# EAGLE board Regulated Linear Power Supply (EAGLE 9.6.2)
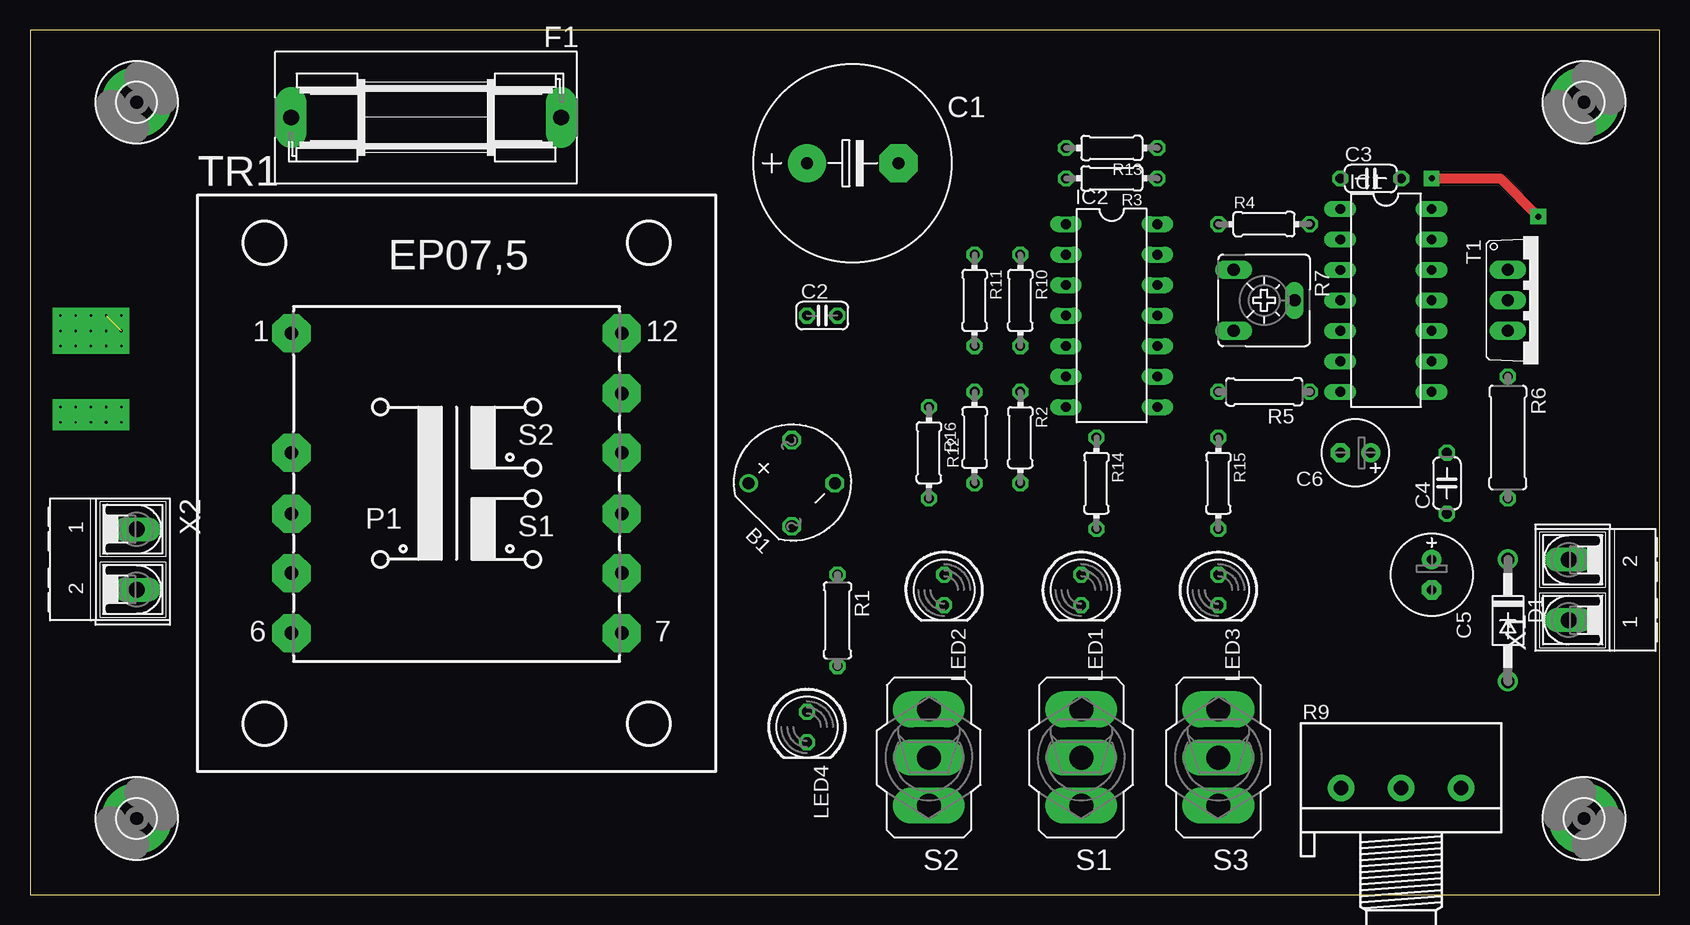
[diagram p0: board, top side]
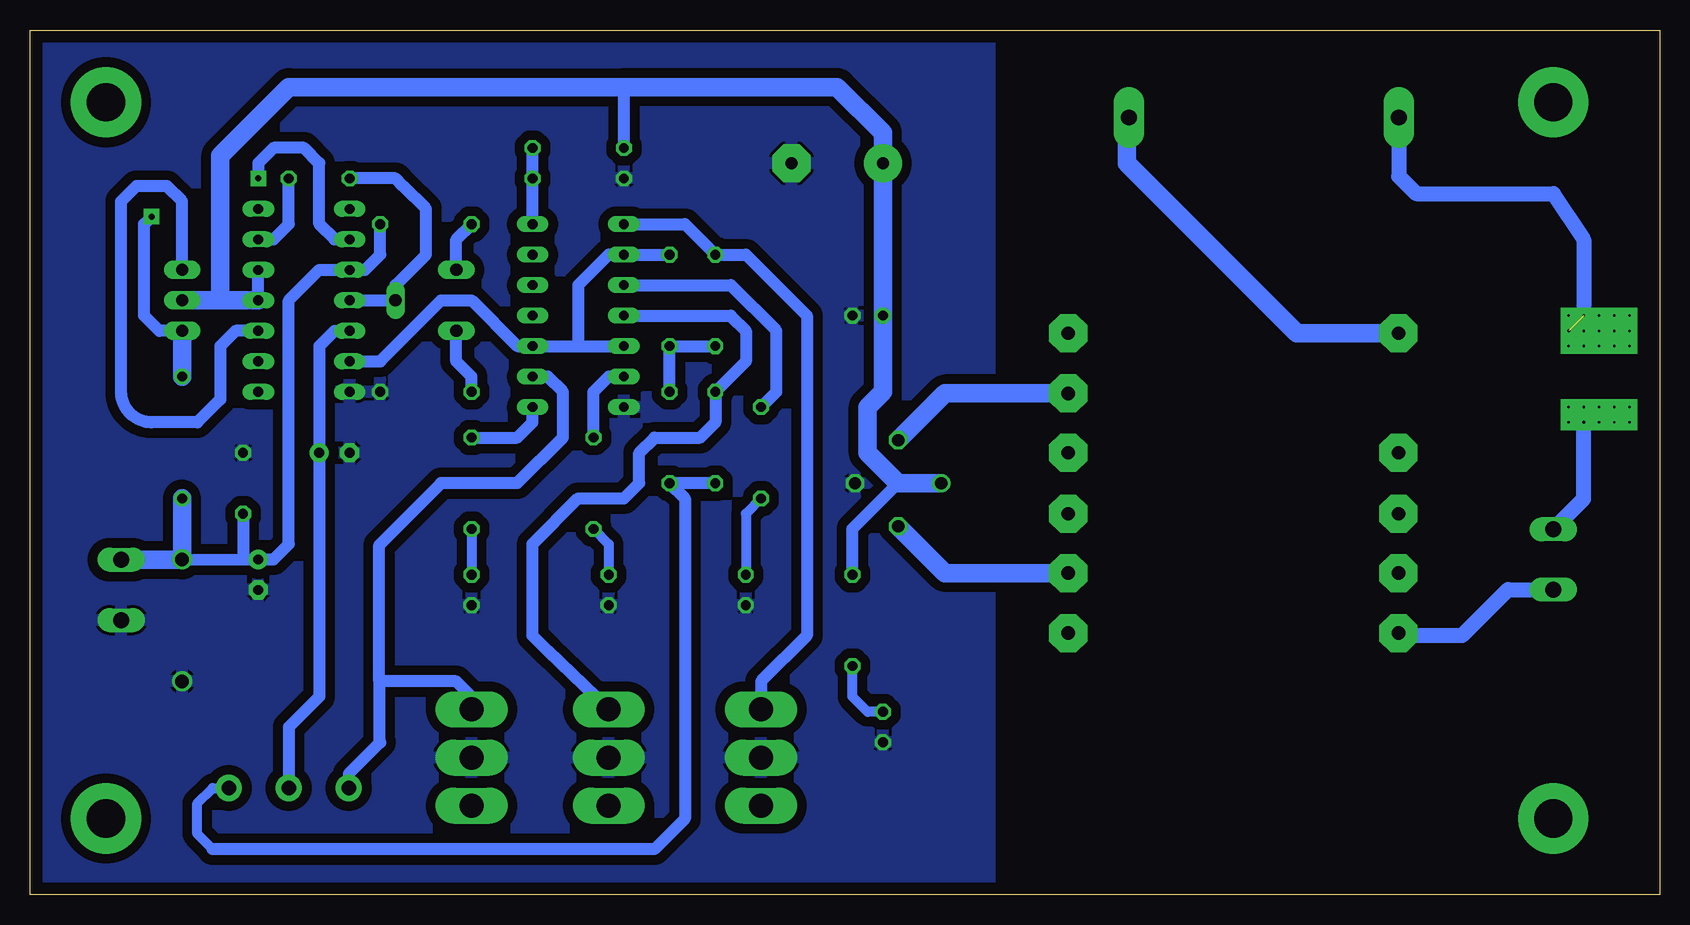
[diagram p1: board, bottom side, seen from below]

Size 135.87 x 72.06 mm. Coordinates in mm from the lower left corner, seen from the top.
Outline: 0,0 135.87,0 135.87,72.06 0,72.06 0,0
Copper layers (1*16): Top 0.035mm / dielectric 1.5mm / Bottom 0.035mm
Design rules "default": minimum track width 6mil, minimum drill 0.35mm, track to track 6mil, track to pad 6mil, pad to pad 6mil, via to via 6mil, smd to smd 6mil, copper to edge 40mil, drill to drill 6mil, minimum pad ring 10mil, minimum via ring 8mil, stop-mask expansion 4mil, vias tented up to drill 0mil, thermal gap 10mil

## Footprints (pad centres in the part's own frame; a part is rotated, then mirrored left to right if it is on the bottom)
RB1A = drill 1.016: + -2.54,2.54 | drill 1.016 octagon: - 2.54,-2.54; AC1 2.54,2.54; AC2 -2.54,-2.54
E7,5-16 = drill 1.016 pad 3.15: + -3.81,0 | drill 1.016 pad 3.15 octagon: - 3.81,0
C025-024X044 = drill 0.813 octagon: 1 -1.27,0; 2 1.27,0
C050-024X044 = drill 0.813 octagon: 1 -2.54,0; 2 2.54,0
E2,5-7 = drill 0.813 pad 1.6: + -1.27,0 | drill 0.813 pad 1.6 octagon: - 1.27,0
E2,5-6 = drill 0.813 pad 1.6: + -1.27,0 | drill 0.813 pad 1.6 octagon: - 1.27,0
DO41-10 = drill 1.118: A 5.08,0; C -5.08,0
SH22,5A = drill 1.321 pad 2.54 long: 1 -11.252,0; 2 11.252,0
3,2-PAD = drill 3.2 pad 5.842: B3,2 0,0
DIL14 = drill 0.813 long: 1 -7.62,-3.81; 2 -5.08,-3.81; 3 -2.54,-3.81; 4 0,-3.81; 5 2.54,-3.81; 6 5.08,-3.81; 7 7.62,-3.81; 8 7.62,3.81; 9 5.08,3.81; 10 2.54,3.81; 11 0,3.81; 12 -2.54,3.81; 13 -5.08,3.81; 14 -7.62,3.81
LED5MM = drill 0.813 octagon: A -1.27,0; K 1.27,0
0207/7 = drill 0.813 octagon: 1 -3.81,0; 2 3.81,0
0204/7 = drill 0.813 octagon: 1 -3.81,0; 2 3.81,0
0309/10 = drill 0.813 octagon: 1 -5.08,0; 2 5.08,0
CA6V = drill 1.016 long: A -2.54,-2.54; E 2.54,-2.54; S 0,2.54
3RP/1610N = drill 1.2 pad 2.184: 1 -5,0; 2 0,0; 3 5,0
320-916 = drill 2.007 long: 1 0,4.013; 2 0,0; 3 0,-4.013
TO220V = drill 1.016 long: 1 -2.54,-2.54; 2 0,-2.54; 3 2.54,-2.54
EP07,5 = drill 1.118 pad 3.175 octagon: 1 -13.767,12.497; 3 -13.767,2.54; 4 -13.767,-2.54; 5 -13.767,-7.493; 6 -13.767,-12.497; 7 13.767,-12.497; 8 13.767,-7.493; 9 13.767,-2.54; 10 13.767,2.54; 11 13.767,7.493; 12 13.767,12.497
AK500/2-H = drill 1.321 long: 1 -2.515,0; 2 2.515,0

## Placement (x,y rotation side)
B1  [RB1A]  63.5,34.29 45 top
C1  4700uF  [E7,5-16]  68.58,60.96 0 top
C2  100nF  [C025-024X044]  66.04,48.26 0 top
C3  120pF  [C050-024X044]  111.76,59.69 0 top
C4  330nF  [C050-024X044]  118.11,34.29 90 top
C5  100uF  [E2,5-7]  116.84,26.67 270 top
C6  4.6uF  [E2,5-6]  110.49,36.83 180 top
D1  1N4004  [DO41-10]  123.19,22.86 270 top
F1  [SH22,5A]  33.02,64.77 180 top
H1  MOUNT-PAD-ROUND3.2  [3,2-PAD]  8.89,6.35 0 top
H2  MOUNT-PAD-ROUND3.2  [3,2-PAD]  8.89,66.04 0 top
H3  MOUNT-PAD-ROUND3.2  [3,2-PAD]  129.54,6.35 90 top
H4  MOUNT-PAD-ROUND3.2  [3,2-PAD]  129.54,66.04 0 top
IC1  LM723N  [DIL14]  113.03,49.53 270 top
IC2  74HC86N  [DIL14]  90.17,48.26 270 top
LED1  [LED5MM]  87.63,25.4 270 top
LED2  [LED5MM]  76.2,25.4 270 top
LED3  [LED5MM]  99.06,25.4 270 top
LED4  [LED5MM]  64.77,13.97 270 top
R1  1k  [0207/7]  67.31,22.86 270 top
R2  1k  [0204/7]  82.55,38.1 270 top
R3  2,2k  [0204/7]  90.17,59.69 180 top
R4  5,1k  [0204/7]  102.87,55.88 0 top
R5  6,8k  [0207/7]  102.87,41.91 180 top
R6  1  [0309/10]  123.19,38.1 270 top
R7  200  [CA6V]  102.87,49.53 270 top
R9  100k  [3RP/1610N]  114.3,8.89 0 top
R10  1,2k  [0204/7]  82.55,49.53 270 top
R11  3,6k  [0204/7]  78.74,49.53 270 top
R12  1,5k  [0204/7]  78.74,38.1 90 top
R13  6,2k  [0204/7]  90.17,62.23 180 top
R14  270  [0204/7]  88.9,34.29 270 top
R15  270  [0204/7]  99.06,34.29 270 top
R16  270  [0204/7]  74.93,36.83 270 top
S1  [320-916]  87.63,11.43 180 top
S2  [320-916]  74.93,11.43 180 top
S3  [320-916]  99.06,11.43 180 top
T1  [TO220V]  125.73,49.53 270 top
TR1  EP07,5  [EP07,5]  35.56,34.29 0 top
X1  [AK500/2-H]  128.27,25.4 90 top
X2  [AK500/2-H]  8.89,27.94 270 top

## Library data of the parts
B1 = rectifier
C1-C6 R1-R6 R10-R16 = rcl
D1 = diode
F1 = fuse; MPN: 0031.7701.11; OC_FARNELL: unknown; OC_NEWARK: 04F1224
H1-H4 = holes
IC1 = linear
IC2 = 74xx-eu
LED1-LED4 = led
R7 R9 = pot
S1-S3 = switch
T1 = transistor
TR1 = trafo
X1 X2 = con-ptr500; OC_FARNELL: unknown; OC_NEWARK: unknown

## Nets
GND: B1.- C1.- C2.2 C4.2 C5.- C6.- D1.A IC1.7 IC2.7 LED1.K LED2.K LED3.K LED4.K R3.2 R5.1 S1.2 S2.2 S3.2 X1.1
IN+: C6.+ IC1.5 R9.2
N$1: IC2.14 R3.1 R13.1
N$2: IC1.2 R6.1 T1.3
N$3: B1.AC1 TR1.11
N$4: B1.AC2 TR1.8
N$5: F1.2
N$6: R4.1 R7.A
N$7: R5.2 R7.E
N$8: C3.1 IC1.4 R7.S
N$9: LED4.A R1.2
N$10: C4.1 C5.+ D1.C IC1.3 R4.2 R6.2 X1.2
N$11: IC1.10 T1.1
N$12: IC2.6 R14.1
N$13: IC2.8 R15.1
N$14: IC2.3 R16.1
N$15: TR1.6 X2.2
N$16: C3.2 IC1.13
N$17: R2.2 R9.3 R12.1
N$18: IC2.9 R9.1 S3.3
N$19: X2.1
N$20: F1.1 TR1.1
N$21: IC2.1 R11.1 S2.3
N$22: IC2.4 R12.2 S1.3
N$23: R2.1 R10.2 R11.2
N$24: LED1.A R14.2
N$25: LED2.A R16.2
N$26: LED3.A R15.2
REF: IC1.6 IC2.2 IC2.5 IC2.10 R10.1
VCC: B1.+ C1.+ C2.1 IC1.11 IC1.12 R1.1 R13.2 T1.2

## Tracks (layer width: path | path; a pad name or v marks a point on that pad's centre or on a via)
GND
  pour Bottom (isolate 0.813): 55.88,74.93 55.88,0 134.62,0 134.62,74.93
IN+
  Bottom 1.016: IC1.5 110.49,46.99 111.76,45.72 C6.+ 111.76,16.51 114.3,13.97 R9.2
N$1
  Bottom 1.016: R13.1 R3.1 IC2.14
N$2  (via drill 0.5 pad 1.3)
  Top 0.813: v116.84,59.69 122.55,59.69 v125.73,56.52
  Bottom 1.016: IC1.2 110.49,54.61 111.76,55.88 111.76,60.96 113.03,62.23 115.57,62.23 116.84,60.96 v116.84,59.69 | T1.3 125.09,46.99 126.36,48.26 126.36,55.88 v125.73,56.52
  Bottom 1.524: T1.3 R6.1
N$3
  Bottom 1.524: TR1.11 59.6,41.78 B1.AC1
N$4
  Bottom 1.524: TR1.8 59.6,26.8 B1.AC2
N$5  (via drill 0.2 pad 1.3, 0.25 pad 1.3)  (1 unrouted)
  Bottom 1.27: F1.2 21.77,59.87 20.32,58.42 8.89,58.42 6.35,54.61 v6.35,48.26
  other vias: 7.62,46.99
N$6
  Bottom 1.016: R7.A 100.33,54.61 R4.1
N$7
  Bottom 1.016: R5.2 99.06,43.18 100.33,44.45 R7.E
N$8
  Bottom 1.016: IC1.4 R7.S 105.41,50.8 102.87,53.34 102.87,57.15 104.77,59.06 105.41,59.69 C3.1
N$9
  Bottom 0.813: LED4.A 66.04,15.24 67.31,16.51 R1.2
N$10
  Bottom 1.016: R4.2 106.68,53.34 107.95,52.07 IC1.3 111.76,52.07 114.3,49.53 114.3,29.21 115.57,27.94 C5.+ 118.11,27.94 | 118.11,27.94 123.19,27.93 D1.C | C4.1 118.11,27.94
  Bottom 1.524: X1.2 128.26,27.93 123.19,27.93 | D1.C R6.2
N$11
  Bottom 1.016: IC1.10 118.74,46.99 120.02,45.72 120.02,41.28 121.92,39.37 125.73,39.37 arc90 128.27,41.91 128.27,57.78 127,59.06 124.46,59.06 123.19,57.78 T1.1
N$12
  Bottom 1.016: R14.1 88.9,41.91 87.63,43.18 IC2.6
N$13
  Bottom 1.016: R15.1 95.25,38.1 93.98,39.37 IC2.8
N$14
  Bottom 1.016: IC2.3 77.47,50.8 73.66,46.99 73.66,41.91 R16.1
N$15
  Bottom 1.27: X2.2 12.68,25.43 16.51,21.59 21.59,21.59 TR1.6
N$16
  Bottom 1.016: IC1.13 115.57,54.61 114.3,55.88 C3.2
N$17
  Bottom 0.813: 120.65,3.81 121.92,5.08 121.92,7.62 120.65,8.89 R9.3
  Bottom 1.016: R12.1 R2.2 81.28,33.02 81.28,6.35 83.82,3.81 120.65,3.81
N$18
  Bottom 1.016: IC2.9 92.71,43.18 91.44,41.91 91.44,38.1 95.25,34.29 101.6,34.29 106.76,29.13 106.76,17.78 | 106.76,17.78 106.76,12.78 106.68,12.7 109.3,10.08 R9.1 | S3.3 99.06,16.51 100.33,17.78 106.76,17.78
N$19  (via drill 0.25 pad 1.3)
  Bottom 1.27: X2.1 6.35,33 v6.35,39.37
N$20
  Bottom 1.524: TR1.1 30.28,46.79 44.45,60.96 44.45,64.77 F1.1
N$21
  Bottom 1.016: IC2.1 81.28,55.88 R11.1 76.2,53.34 71.12,48.26 71.12,21.59 74.93,17.78 S2.3
N$22
  Bottom 1.016: IC2.4 77.47,48.26 76.2,46.99 76.2,44.45 R12.2 78.74,39.37 80.01,38.1 83.82,38.1 85.09,36.83 85.09,34.29 86.36,33.02 90.17,33.02 93.98,29.21 93.98,21.59 92.71,20.32 S1.3
N$23
  Bottom 1.016: R11.2 R10.2 R2.1
N$24
  Bottom 0.813: R14.2 87.63,29.21 LED1.A
N$25
  Bottom 0.813: R16.2 76.2,31.75 LED2.A
N$26
  Bottom 0.813: R15.2 LED3.A
N$32  (via drill 0.2 pad 1.3)
  other vias: 6.35,46.99
N$33  (via drill 0.2 pad 1.3)
  other vias: 5.08,46.99
N$36  (via drill 0.2 pad 1.3)
  other vias: 5.08,40.64
N$37  (via drill 0.2 pad 1.3)
  other vias: 6.35,40.64
N$38  (via drill 0.2 pad 1.3)
  other vias: 7.62,40.64
N$41  (via drill 0.2 pad 1.3)
  other vias: 5.08,48.26
N$45  (via drill 0.2 pad 1.3)
  other vias: 7.62,48.26
N$46  (via drill 0.2 pad 1.3)
  other vias: 7.62,39.37
N$47  (via drill 0.2 pad 1.3)
  other vias: 5.08,39.37
N$48  (via drill 0.2 pad 1.3)
  other vias: 3.81,48.26
N$49  (via drill 0.2 pad 1.3)
  other vias: 3.81,46.99
N$50  (via drill 0.2 pad 1.3)
  other vias: 3.81,40.64
N$51  (via drill 0.2 pad 1.3)
  other vias: 3.81,39.37
N$52  (via drill 0.2 pad 1.3)
  other vias: 3.81,45.72
N$53  (via drill 0.2 pad 1.3)
  other vias: 5.08,45.72
N$54  (via drill 0.2 pad 1.3)
  other vias: 6.35,45.72
N$55  (via drill 0.2 pad 1.3)
  other vias: 7.62,45.72
N$60  (via drill 0.2 pad 1.3)
  other vias: 2.54,48.26
N$61  (via drill 0.2 pad 1.3)
  other vias: 2.54,46.99
N$62  (via drill 0.2 pad 1.3)
  other vias: 2.54,45.72
N$63  (via drill 0.2 pad 1.3)
  other vias: 2.54,40.64
N$64  (via drill 0.2 pad 1.3)
  other vias: 2.54,39.37
REF
  Bottom 1.016: 90.17,45.72 90.17,50.8 87.63,53.34 IC2.2 R10.1 | 90.17,45.72 IC2.5 | 90.17,45.72 IC2.10 95.25,45.72 99.06,49.53 101.6,49.53 106.68,44.45 IC1.6
VCC
  Bottom 1.016: R13.2 86.36,67.31 | R1.1 67.31,30.48 63.5,34.29 | IC1.11 IC1.12
  Bottom 1.524: B1.+ 63.5,34.29 66.04,36.83 66.04,40.64 64.77,41.91 C2.1 C1.+ 64.77,63.5 68.58,67.31 86.36,67.31 114.3,67.31 120.02,61.59 120.02,49.53 T1.2 IC1.11